# Altium PCB PCB_Definitivo.PcbDoc
Units mm, origin at the board's own origin, x right, y up, seen from the top; angles counter-clockwise.
Board outline 75.4 x 71.13 mm, 2 copper layers (Top Layer, Bottom Layer); 27 components, 34 nets, 118 pads, 4 vias.
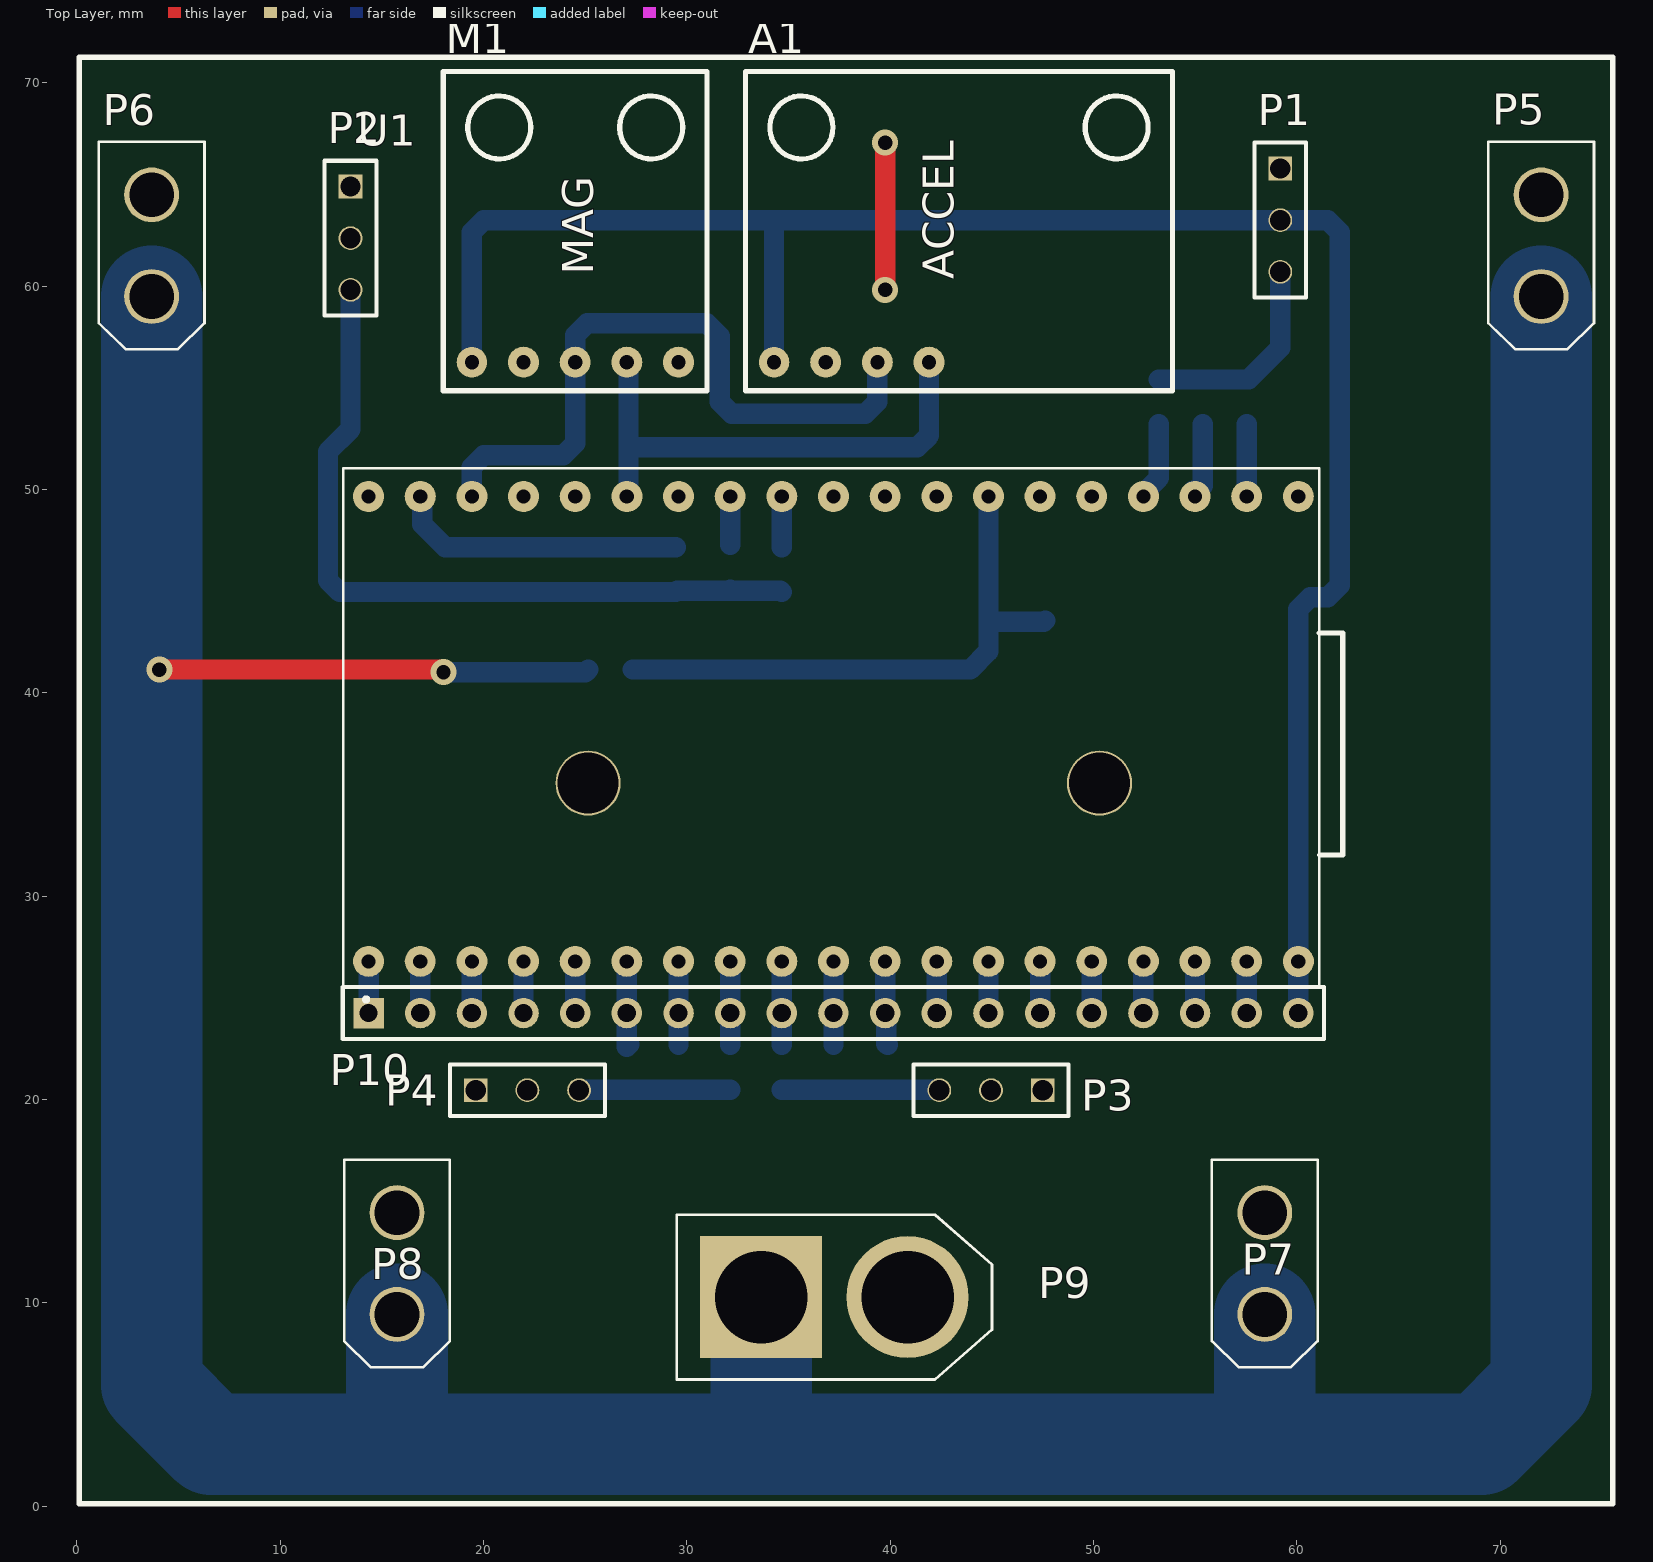
[diagram p0: Top Layer view]
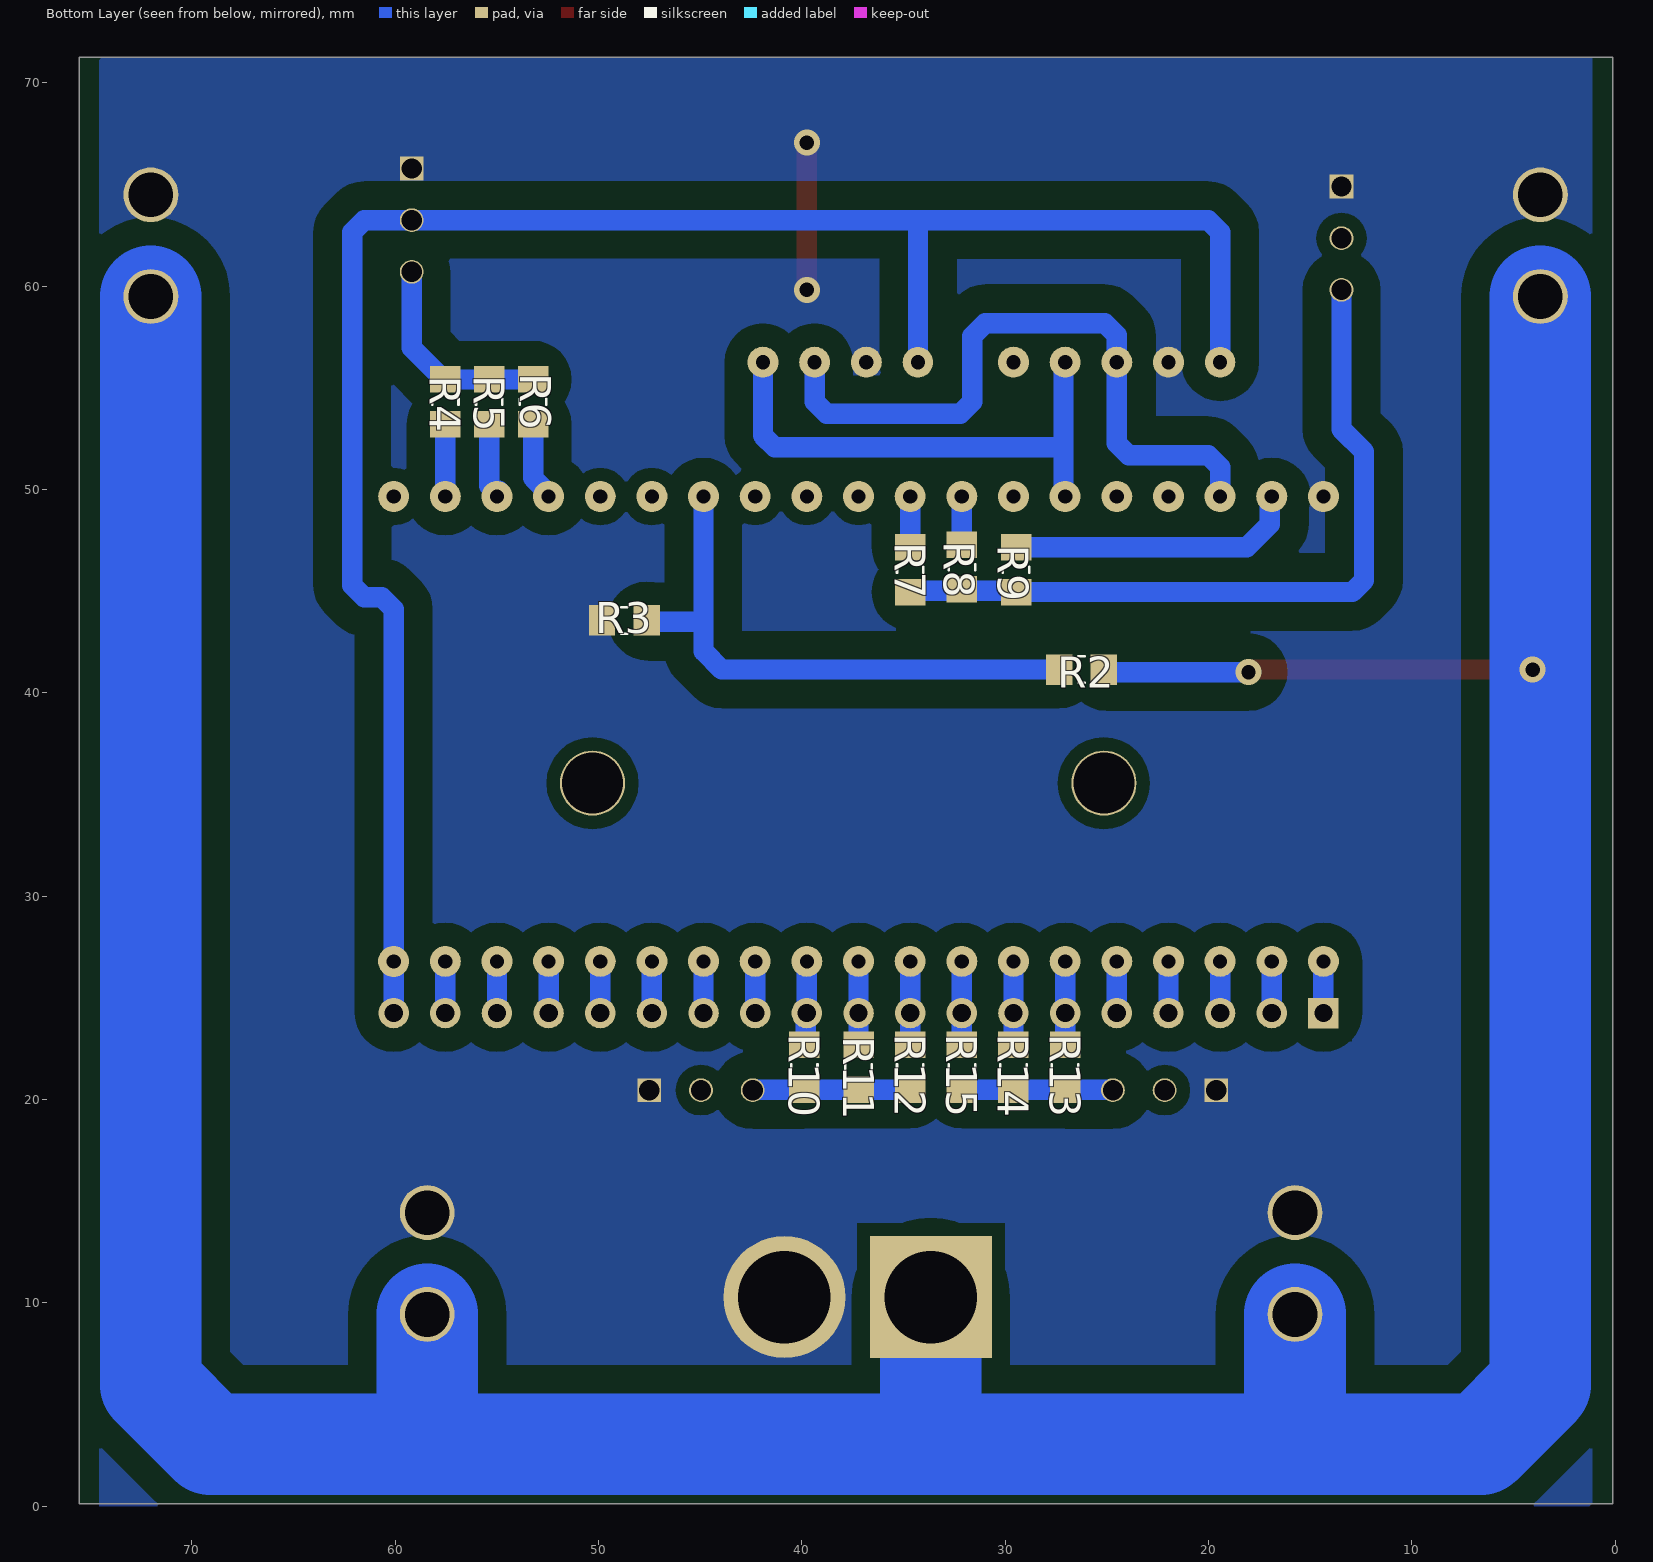
[diagram p1: Bottom Layer view, seen from below]

## Layer stack, top to bottom
Top Solder: solder mask 0.0102, Solder Resist, Dk 3.5
Top Layer: signal copper 0.0356
Dielectric 1: dielectric 0.32, FR-4, Dk 4.8
Bottom Layer: signal copper 0.0356
Bottom Solder: solder mask 0.0102, Solder Resist, Dk 3.5

## Board outline
0.127,0.127 0.127,71.252 75.527,71.252 75.527,0.127

## Design rules (kind name [scope] priority, off if disabled: settings)
Clearance [All] p1: gap=0.65 ignorepadtopadclearanceinfootprint=TRUE except(0: Arc-Hole Track-Hole SMDPad-Hole THPad-Hole Via-Hole Fill-Hole Poly-Hole Region-Hole Text-Hole; 1.4: Track-Poly)
PolygonConnect [All] p1: connectstyle=Direct reliefconductorwidth=0.254 reliefentries=4 polygonreliefangle="90 Angle" airgapwidth=0.254
RoutingVias [All] p1: holewidth=0.711 width=1.27 viastyle="Through Hole" minholewidth=0.711 minwidth=1.27 maxholewidth=0.711 maxwidth=1.27
SolderMaskExpansion [All] p1: expansion=0.102 istentingtop=FALSE
Width [All] p1: maxlimit=5 minlimit=0.7 preferedwidth=1
30 further rules are at their usual default settings.

## Components (designator, comment, footprint, x,y, rotation, side; value= is the part's Value field where it differs from the comment)
A1 "Accelerometer" ACCELEROMETER 32.885,54.856 r90 top
M1 "Magnetometer" Magnetometer 18.026,54.856 r90 top
P1 "MHDR1X3" SAMTEC_BBS-102-X-X 59.182,64.516 r270 top
P2 "MHDR1X3" SAMTEC_BBS-102-X-X 13.462,63.627 r270 top
P3 "MHDR1X3" SAMTEC_BBS-102-X-X 46.228,20.465 r180 top
P4 "MHDR1X3" SAMTEC_BBS-102-X-X 20.891,20.465 r0 top
P5 "MHDR1X2" XT30UPB-M 72.009,61.992 r270 top
P6 "MHDR1X2" XT30UPB-M 3.683,61.992 r270 top
P7 "MHDR1X2" XT30UPB-M 58.42,11.938 r270 top
P8 "MHDR1X2" XT30UPB-M 15.748,11.938 r270 top
P9 "MHDR1X2" AMASS_XT60-M 37.255,10.287 r0 top
P10 "Header 19" HDR1X19 14.351,24.257 r0 top
R2 "Res1" res 26.246,41.148 r0 bottom value=3K
R3 "Res1" res 48.725,43.561 r0 bottom value=1K
R4 "Res1" res 57.531,54.313 r90 bottom value=1K
R5 "Res1" res 55.372,54.313 r270 bottom value=1K
R6 "Res1" res 53.213,54.313 r90 bottom value=1K
R7 "Res1" res 34.671,46.058 r270 bottom value=1K
R8 "Res1" res 32.131,46.185 r90 bottom value=1K
R9 "Res1" res 29.464,46.058 r270 bottom value=1K
R10 "Res1" res 39.878,21.59 r270 bottom value=1K
R11 "Res1" res 37.211,21.59 r90 bottom value=1K
R12 "Res1" res 34.671,21.59 r270 bottom value=1K
R13 "Res1" res 27.051,21.59 r270 bottom value=1K
R14 "Res1" res 29.591,21.59 r90 bottom value=1K
R15 "Res1" res 32.131,21.59 r270 bottom value=1K
U1 "" MODULE_ESP32-DEVKITC 14.351,49.657 r90 top locked

## Footprints (in the part's own frame and the unit in brackets; to place one, negate y for a bottom-side part, rotate by r counter-clockwise, add the part's x,y. Pads: shape width x height; smd on the part's side, far side on the other; paste and mask are expansions set on the pad)
ACCELEROMETER [mm]
  round 1.5 hole 0.7: 1(1.405,-1.405)
  round 1.524 hole 0.7: 2(1.405,-3.945) 3(1.405,-6.485) 4(1.405,-9.025)
  silkscreen extent 0,-21 15.7,0
AMASS_XT60-M [mm]
  rect 6x6 / inner round 6 / far side rect 6x6 hole 4.55: 1(-3.6,0)
  round 6 hole 4.55: 2(3.6,0)
  silkscreen extent -7.75,-4.05 7.75,4.05
HDR1X19 [mm] "Connector; Header; 19 Position"
  rect 1.5x1.5 hole 0.9: 1(0,0)
  round 1.5 hole 0.9: 2(2.54,0) 3(5.08,0) 4(7.62,0) 5(10.16,0) 6(12.7,0) 7(15.24,0) 8(17.78,0) 9(20.32,0) 10(22.86,0) 11(25.4,0) 12(27.94,0) 13(30.48,0) 14(33.02,0) 15(35.56,0) 16(38.1,0) 17(40.64,0) 18(43.18,0) 19(45.72,0)
  silkscreen extent -1.27,-1.27 46.99,1.27
Magnetometer [mm]
  round 1.5 hole 0.7: 1(1.405,-1.405)
  round 1.524 hole 0.7: 2(1.405,-3.945) 3(1.405,-6.485) 4(1.405,-9.025) 5(1.405,-11.565)
  silkscreen extent 0,-12.97 15.7,0
MODULE_ESP32-DEVKITC [mil]
  round 60 hole 27.56: 1(-900,0) 2(-900,-100) 3(-900,-200) 4(-900,-300) 5(-900,-400) 6(-900,-500) 7(-900,-600) 8(-900,-700) 9(-900,-800) 10(-900,-900) 11(-900,-1000) 12(-900,-1100) 13(-900,-1200) 14(-900,-1300) 15(-900,-1400) 16(-900,-1500) 17(-900,-1600) 18(-900,-1700) 20(0,-1800) 21(0,-1700) 22(0,-1600) 24(0,-1400) 25(0,-1300) 27(0,-1100) 28(0,-1000) 29(0,-900) 30(0,-800) 31(0,-700) 32(0,-600) 34(0,-400) 35(0,-300)
  round 60.24 hole 27.56: 19(-900,-1800) 23(0,-1500) 26(0,-1200) 33(0,-500) 36(0,-200) 37(0,-100) 38(0,0)
  silkscreen extent -978,-1886 55,49
res [mm]
  rect 1.3x1.5 smd: 1(-1.1,0) 2(1.1,0)
  silkscreen extent -0.15,-0.65 0.15,0.65
SAMTEC_BBS-102-X-X [mm]
  rect 1.168x1.168 hole 1: 1(-1.27,0)
  round 1.168 hole 1: 2(1.27,0) 3(3.81,0)
  silkscreen extent -2.54,-1.27 5.08,1.27
XT30UPB-M [mm]
  round 2.7 hole 2.2: 1(-2.5,0) 2(2.5,0)
  silkscreen extent -5.1,-2.6 5.1,2.6

## Part data
A1: library part HW123_Accelerator
P1 P2 P3 P4: "Header, 3-Pin", LatestRevisionDate=17-Jul-2002, LatestRevisionNote="Re-released for DXP Platform.", Publisher="Altium Limited"
P5 P6 P7 P8 P9: "Header, 2-Pin", LatestRevisionDate=17-Jul-2002, LatestRevisionNote="Re-released for DXP Platform.", Publisher="Altium Limited"
P10: "Header, 19-Pin", LatestRevisionDate=17-Jul-2002, LatestRevisionNote="Re-released for DXP Platform.", Publisher="Altium Limited"
R2 R3 R4 R5 R6 R7 R8 R9 R10 R11 R12 R13 R14 R15: "Resistor", LatestRevisionDate=17-Jul-2002, LatestRevisionNote="Re-released for DXP Platform.", PackageDescription="Axial Device, Thru-Hole; 2 Leads; 0.3 in Pin Spacing", PackageReference=AXIAL-0.3, Published=8-Jun-2000, Publisher="Altium Limited"
U1: library part ESP32-DEVKITC, "- Transceiver; 802.11 b/g/n _Wi-Fi, WiFi, WLAN_, BluetoothÂ® Smart Ready 4.x Dual Mode For Use With ESP-WROOM-32", Package=None, Availability=Unavailable, MF="Espressif Systems", MP=ESP32-DEVKITC-32D-F, Price=None, SnapEDA_Link=https://www.snapeda.com/parts/ESP32-DEVKITC-32D-F/Espressif%20Systems/view-part/4220172/?ref=snap

## Free pads (board coordinates)
  round 3.2 hole 3: 2(25.146,35.56) 3(50.292,35.56)

## Via types
v1: diameter 1.27, hole 0.711, Top Layer to Bottom Layer, 4 vias

## Nets (pads, with @x,y where several pads share a name; then routed paths per layer and width w, separated by ;. In a path a pad name is that pad's centre, name@x,y a point inside that pad or via, vN(x,y) a via of type N, cw(c..) or ccw(c..) an arc to the next point about the centre after c; other vN are vias at no path point)
+12: P5.2 P6.2 P7.2 P8.2 P9.1 R2.1 | length 219.1
  Top Layer w1: v1(4.064,41.148) 17.907,41.148 v1(18.034,41.021)
  Bottom Layer w1: v1(18.034,41.021) 25.019,41.021 R2.1
  Bottom Layer w5: P6.2 3.683,5.977 6.612,3.048 15.621,3.048 ; P8.2 15.748,3.175 15.621,3.048 ; P9.1 33.655,3.048 ; P7.2 58.42,3.175 58.293,3.048 ; P5.2 72.009,5.977 69.08,3.048 58.293,3.048 ; 15.621,3.048 33.655,3.048 ; 33.655,3.048 58.293,3.048
A: P10.8 R15.1 U1.8 | length 4.1
  Bottom Layer w1: R15.1 P10.8 U1.8
B: P10.9 R12.1 U1.9 | length 4.1
  Bottom Layer w1: R12.1 P10.9 U1.9
C: R9.1 U1.37 | length 14.4
  Bottom Layer w1: U1.37 16.992,49.556 16.992,48.286 18.12,47.158 R9.1
D: R6.1 U1.23 | length 4
  Bottom Layer w1: U1.23@52.35,49.758 U1.23 52.451,49.8 53.213,50.562 R6.1
E: R5.2 U1.22 | length 4
  Bottom Layer w1: U1.22@54.891,49.941 54.891,49.757 U1.22 54.991,49.799 55.372,50.18 R5.2
F: R4.1 U1.21 | length 3.9
  Bottom Layer w1: U1.21@57.431,49.921 57.431,49.757 U1.21 R4.1
G: R8.2 U1.31 | length 2.4
  Bottom Layer w1: R8.2 U1.31
GND: A1.2 M1.2 P1.1 P2.1 P3.1 P4.1 P5.1 P6.1 P7.1 P8.1 P9.2 R3.2 U1.38 | length 7.2
  Top Layer w1: v1(39.751,59.817) v1(39.751,67.056)
H: R7.1 U1.30 | length 2.5
  Bottom Layer w1: R7.1 U1.30
I: P10.10 R11.2 U1.10 | length 4.1
  Bottom Layer w1: R11.2 P10.10 U1.10
J: P10.11 R10.1 U1.11 | length 4.2
  Bottom Layer w1: U1.11 P10.11 39.814,24.194 39.814,22.754 R10.1
K: P10.7 R14.2 U1.7 | length 4.1
  Bottom Layer w1: R14.2 P10.7 U1.7
L: P10.6 R13.1 U1.6 | length 4.3
  Bottom Layer w1: R13.1@27.051,22.606 R13.1@27.165,22.72 ; R13.1 P10.6 U1.6
NetP1_3: P1.3 R4.2 R5.1 R6.2 | length 10.4
  Bottom Layer w1: R6.2 R5.1 R4.2 57.631,55.413 59.182,56.964 P1.3
NetP2_3: P2.3 R7.2 R8.1 R9.2 | length 37.4
  Bottom Layer w1: P2.3 13.462,52.959 12.352,51.849 12.352,45.544 12.938,44.958 R9.2 29.527,45.021 32.067,45.021 R8.1 32.194,45.021 34.608,45.021 R7.2
NetP3_3: P3.3 R10.2 R11.1 R12.2 | length 7.8
  Bottom Layer w1: R12.2 R11.1 R10.2 39.891,20.477 42.405,20.477 P3.3
NetP4_3: P4.3 R13.2 R14.1 R15.2 | length 7.5
  Bottom Layer w1: P4.3@24.747,20.465 P4.3 24.714,20.477 27.038,20.477 R13.2 R14.1 R15.2
NetP10_1: P10.1 U1.1 | length 2.5
  Bottom Layer w1: P10.1 U1.1
NetP10_2: P10.2 U1.2 | length 2.5
  Bottom Layer w1: P10.2 U1.2
NetP10_3: P10.3 U1.3 | length 2.5
  Bottom Layer w1: P10.3 U1.3
NetP10_4: P10.4 U1.4 | length 2.5
  Bottom Layer w1: P10.4 U1.4
NetP10_5: P10.5 U1.5 | length 2.5
  Bottom Layer w1: P10.5 U1.5
NetP10_12: P10.12 U1.12 | length 2.5
  Bottom Layer w1: P10.12 U1.12
NetP10_13: P10.13 U1.13 | length 2.5
  Bottom Layer w1: P10.13 U1.13
NetP10_14: P10.14 U1.14 | length 2.5
  Bottom Layer w1: P10.14 U1.14
NetP10_15: P10.15 U1.15 | length 2.5
  Bottom Layer w1: P10.15 U1.15
NetP10_16: P10.16 U1.16 | length 2.5
  Bottom Layer w1: P10.16 U1.16
NetP10_17: P10.17 U1.17 | length 2.5
  Bottom Layer w1: P10.17 U1.17
NetP10_18: P10.18 U1.18 | length 2.5
  Bottom Layer w1: P10.18 U1.18
P25: R2.2 R3.1 U1.26 | length 28.3
  Bottom Layer w1: R2.2 43.942,41.148 44.831,42.037 44.831,43.624 ; U1.26 44.831,43.624 ; R3.1 47.561,43.497 44.958,43.497 44.831,43.624
SCL: A1.3 M1.3 U1.36 | length 33.4
  Bottom Layer w1: U1.36 19.431,51.103 20.017,51.689 23.925,51.689 24.511,52.275 M1.3 24.511,57.587 25.097,58.173 30.981,58.173 31.623,57.531 31.623,54.307 32.209,53.721 38.784,53.721 39.37,54.307 A1.3
SDA: A1.4 M1.4 U1.33 | length 24.8
  Bottom Layer w1: U1.33@26.955,49.753 U1.33 27.131,49.737 27.131,52.539 27.131,56.181 M1.4 ; 27.732,52.07 41.324,52.07 41.91,52.656 A1.4
VCC: A1.1 M1.1 P1.2 P10.19 U1.19 | length 95.7
  Bottom Layer w1: M1.1 19.431,62.66 20.017,63.246 61.517,63.246 62.103,62.66 62.103,45.29 61.517,44.704 60.657,44.704 60.071,44.118 60.071,29.195 U1.19 P10.19 ; A1.1 34.29,62.66
pads on no net: M1.5 P2.2 P3.2 P4.2 U1.20 U1.24 U1.25 U1.27 U1.28 U1.29 U1.32 U1.34 U1.35

## Polygon pours and split planes (outlines as drawn)
GND on Bottom Layer "GND_L02_P000" (solid, pour order 0): 1.143,0.127 1.27,0 74.549,0 74.549,71.12 74.422,71.247 1.143,71.247

## Silkscreen, mask and mechanical layers (free items; w line width, h text height)
Top Overlay:
  the board outline again, w0.254

## Text inside footprints (layer, text, board x,y; h text height)
A1: Top Overlay "ACCEL" at 43.131,60.343 h1.52 r90
M1: Top Overlay "MAG" at 25.392,60.571 h1.52 r90